# Altium PCB pcb.PcbDoc
Units mm, origin at the board's own origin, x right, y up, seen from the top; angles counter-clockwise.
Board outline 35 x 11 mm, 2 copper layers (Top Layer, Bottom Layer), stack 1.971 mm thick; 27 components, 23 nets, 113 pads, 17 vias.
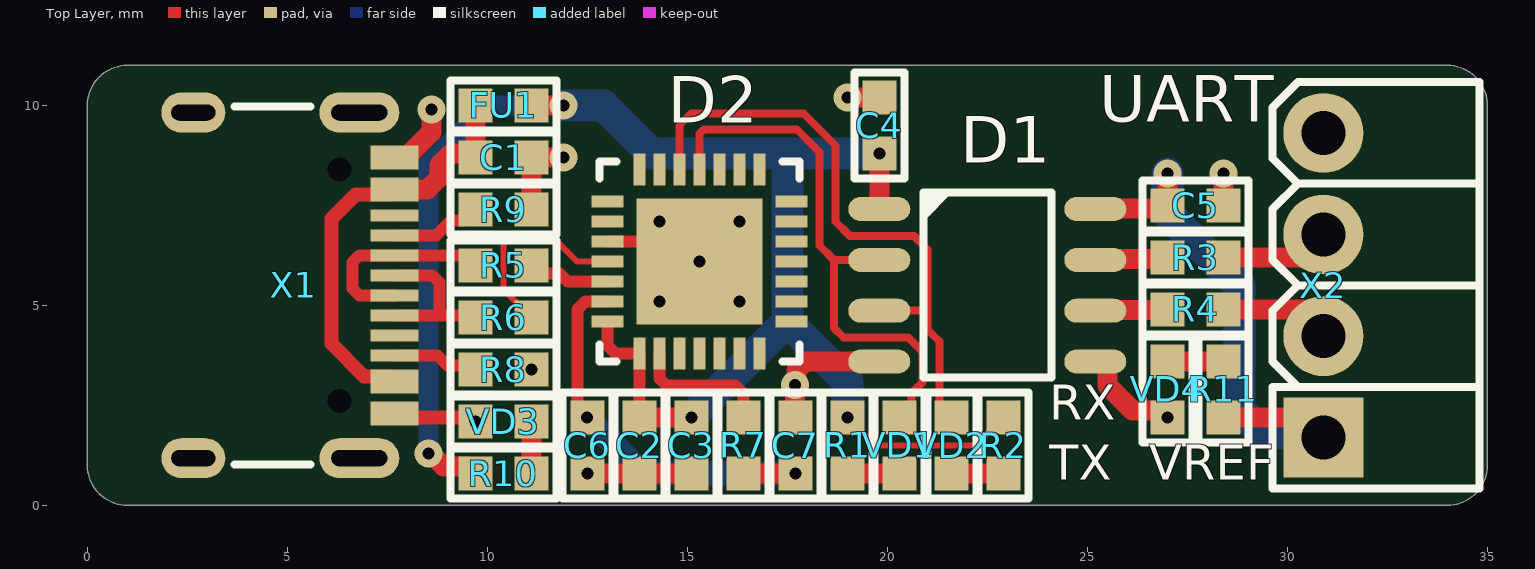
[diagram p0: Top Layer view]
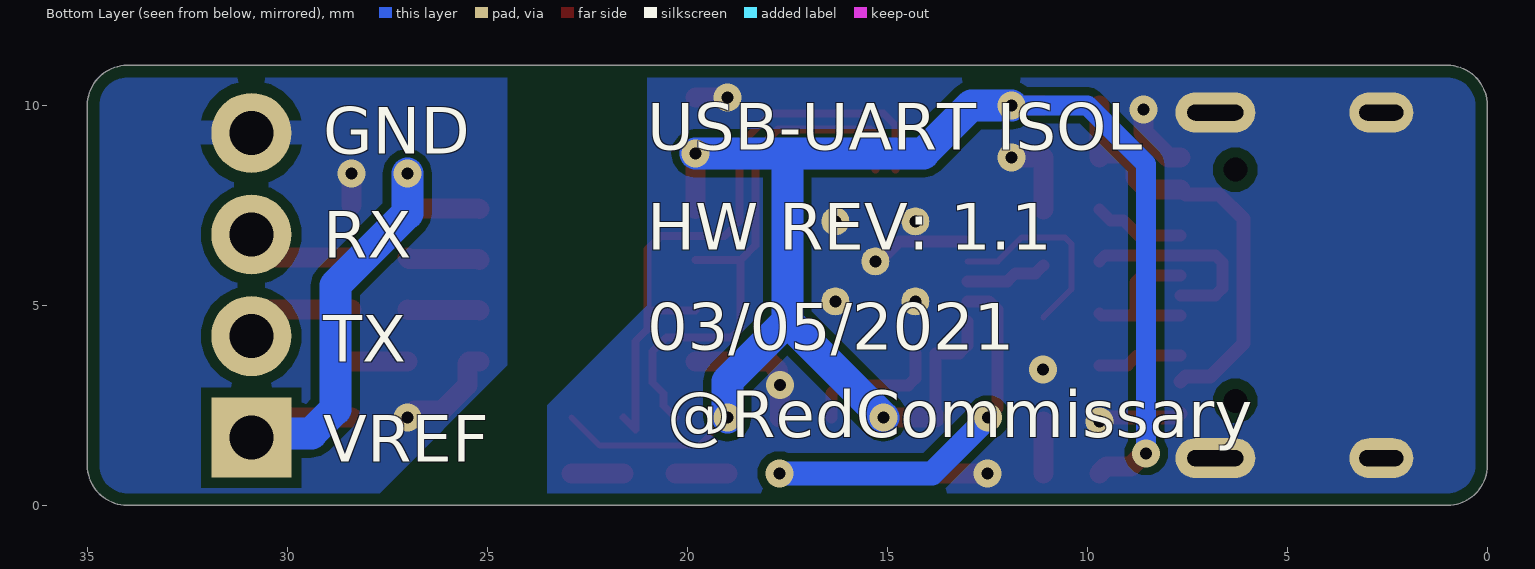
[diagram p1: Bottom Layer view, seen from below]
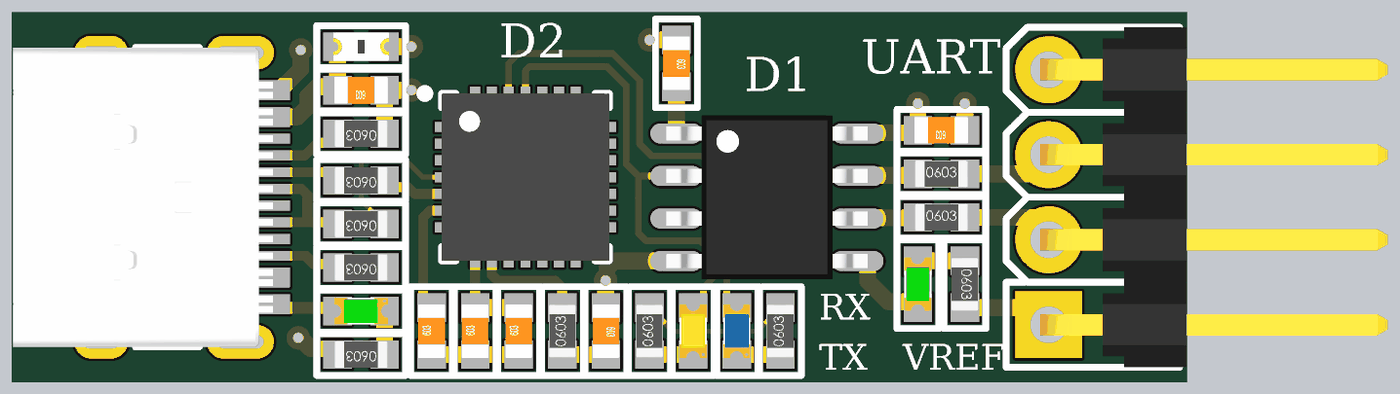
[diagram p2: 3D render of the assembled board from above, using the file's embedded part models]

## Layer stack, top to bottom
Top Solder: solder mask 0.0102, Solder Resist, Dk 3.5
Top Layer: signal copper 0.0356
Dielectric 1: dielectric 1.9, FR-4, Dk 4.8
Bottom Layer: signal copper 0.0356
Bottom Solder: solder mask 0.0102, Solder Resist, Dk 3.5

## Board outline
0,1 0,10 cw(c1,10) 1,11 34,11 cw(c34,10) 35,10 35,1 cw(c34,1) 34,0 1,0 cw(c1,1)

## Design rules (kind name [scope] priority, off if disabled: settings)
BoardOutlineClearance [All] p1: gap=0.3 ignorepadtopadclearanceinfootprint=FALSE
Clearance Clearance_NPTH [All vs InPadClass('NPTH')] p1: gap=0.4 ignorepadtopadclearanceinfootprint=FALSE except(0: Arc-Hole Track-Hole SMDPad-Hole THPad-Hole Via-Hole Fill-Hole Poly-Hole Region-Hole Text-Hole)
Clearance Clearance_MultiLayerPad [OnLayer('Multi-Layer') and IsPad] p2: gap=0.25 ignorepadtopadclearanceinfootprint=FALSE except(0: Arc-Hole Track-Hole SMDPad-Hole THPad-Hole Via-Hole Fill-Hole Poly-Hole Region-Hole Text-Hole)
Clearance Clearance_Polygon [InPolygon] p3: gap=0.2 ignorepadtopadclearanceinfootprint=FALSE except(0: Arc-Hole Track-Hole SMDPad-Hole THPad-Hole Via-Hole Fill-Hole Poly-Hole Region-Hole Text-Hole; 0.5: Poly-Poly)
Clearance [All] p4: gap=0.2 ignorepadtopadclearanceinfootprint=FALSE except(0: Arc-Hole Track-Hole SMDPad-Hole THPad-Hole Via-Hole Fill-Hole Poly-Hole Region-Hole Text-Hole)
Height [All] p1: minheight=0 maxheight=60 prefheight=12.7
HoleSize [All] p1: absolutevalues=TRUE maxlimit=5 minlimit=0.025 maxpercent=80.000 minpercent=20.000
HoleToHoleClearance [All] p1: gap=0.2 allowstackedmicrovias=TRUE
MinimumSolderMaskSliver [All] p1: minsoldermaskwidth=0.05
PlaneClearance [All] p1: clearance=0.5
PlaneConnect [All] p1: planeconnectstyle=Relief reliefexpansion=0.5 reliefentries=4 reliefconductorwidth=0.3 reliefairgap=0.2
PolygonConnect PolygonConnect_PowerPAD [All vs InPadClass('PowerPAD')] p1: connectstyle=Direct reliefconductorwidth=1 reliefentries=4 polygonreliefangle="90 Angle" airgapwidth=0.3
PolygonConnect PolygonConnect_PadGND [InNet('GND') and IsPad] p2: connectstyle=Direct reliefconductorwidth=0.5 reliefentries=4 polygonreliefangle="90 Angle" airgapwidth=0.2
PolygonConnect PolygonConnect_Via [IsVia] p3: connectstyle=Direct reliefconductorwidth=0.254 reliefentries=4 polygonreliefangle="90 Angle" airgapwidth=0.254
PolygonConnect [All] p4: connectstyle=Relief reliefconductorwidth=0.6 reliefentries=4 polygonreliefangle="90 Angle" airgapwidth=0.3
RoutingVias [All] p1: holewidth=0.3 width=0.7 viastyle="Through Hole" minholewidth=0.3 minwidth=0.6 maxholewidth=0.5 maxwidth=1.2
SilkToSilkClearance [All] p1: silktosilkclearance=0
SilkToSolderMaskClearance [IsPad] p1: minsilkscreentomaskgap=0.05 clearancetoexposedcopper=TRUE
SolderMaskExpansion [All] p1: expansion=0.075 istentingtop=FALSE
Width [All] p1: maxlimit=10 minlimit=0.15 preferedwidth=0.15
22 further rules are at their usual default settings.

## Components (designator, comment, footprint, x,y, rotation, side; value= is the part's Value field where it differs from the comment)
C1 "Ceramic capacitor, 4.7μF, X7R, ±10%, 6.3V, 0603, -55...+125°C" "CAP: 0603" 10.4,8.7 r180 top value=4.7μF
C2 "Ceramic capacitor, 4.7μF, X7R, ±10%, 6.3V, 0603, -55...+125°C" "CAP: 0603" 13.8,1.5 r90 top value=4.7μF
C3 "Ceramic capacitor, 0.1μF, X7R, ±10%, 50V, 0603, -55...+125°C" "CAP: 0603" 15.1,1.5 r90 top value=0.1μF
C4 "Ceramic capacitor, 0.1μF, X7R, ±10%, 50V, 0603, -55...+125°C" "CAP: 0603" 19.8,9.5 r270 top value=0.1μF
C5 "Ceramic capacitor, 4.7μF, X7R, ±10%, 6.3V, 0603, -55...+125°C" "CAP: 0603" 27.7,7.5 r180 top value=4.7μF
C6 "Ceramic capacitor, 4.7μF, X7R, ±10%, 6.3V, 0603, -55...+125°C" "CAP: 0603" 12.5,1.5 r90 top value=4.7μF
C7 "Ceramic capacitor, 0.1μF, X7R, ±10%, 50V, 0603, -55...+125°C" "CAP: 0603" 17.7,1.5 r270 top value=0.1μF
D1 "IC digital isolator, 100Mbps, 3000Vrms, 2.25...5.5V, -55...+125°C, 8-SOIC" 8-SOIC 22.5,5.5 r0 top locked
D2 "IC usb-to-uart bridge, USB2.0, 3...3.6V, -40...+85°C, 28-VFQFN" "28-QFN (5x5)" 15.3,6.1 r0 top
FU1 "Electromechanics relay, 63VDC, 0.5A, case 0603," "FUSE: 0603" 10.4,10 r0 top
R1 "Resistor film, 1k, ±5%, 0603, 0.1W, -55...+125°C" "RES: 0603" 19,1.5 r90 top value=1k
R2 "Resistor film, 1k, ±5%, 0603, 0.1W, -55...+125°C" "RES: 0603" 22.9,1.5 r90 top value=1k
R3 "Resistor film, 100R, ±5%, 0603, 0.1W, -55...+125°C" "RES: 0603" 27.7,6.2 r0 top value=100R
R4 "Resistor film, 100R, ±5%, 0603, 0.1W, -55...+125°C" "RES: 0603" 27.7,4.9 r0 top value=100R
R5 "Resistor film, 22R, ±1%, 0603, 0.1W, -55...+125°C" "RES: 0603" 10.4,6 r180 top value=22R
R6 "Resistor film, 22R, ±1%, 0603, 0.1W, -55...+125°C" "RES: 0603" 10.4,4.7 r180 top value=22R
R7 "Resistor film, 1k, ±1%, 0603, 0.1W, -55...+125°C" "RES: 0603" 16.4,1.5 r90 top value=1k
R8 "Resistor film, 5k1, ±1%, 0603, 0.1W, -55...+125°C" "RES: 0603" 10.4,3.4 r180 top value=5k1
R9 "Resistor film, 5k1, ±1%, 0603, 0.1W, -55...+125°C" "RES: 0603" 10.4,7.4 r180 top value=5k1
R10 "Resistor film, 1k, ±5%, 0603, 0.1W, -55...+125°C" "RES: 0603" 10.4,0.8 r180 top value=1k
R11 "Resistor film, 1k, ±5%, 0603, 0.1W, -55...+125°C" "RES: 0603" 28.4,2.9 r270 top value=1k
VD1 "LED, 20mA, 2V, 0603, -55...+150°C" "LED: 0603Y" 20.3,1.5 r90 top
VD2 "LED, 20mA, 3.2V, 0603, -55...+150°C" "LED: 0603B" 21.6,1.5 r90 top
VD3 "LED, 20mA, 2V, 0603, -55...+150°C" "LED: 0603G" 10.4,2.1 r180 top
VD4 "LED, 20mA, 2V, 0603, -55...+150°C" "LED: 0603G" 27,2.9 r270 top
X1 "USB Type C, 3A" "CON: TYPE-C-31-M-12" 6.3,5.5 r90 top locked
X2 "Connector, 4pin, 2.54mm, 500VAC, 3A" "CON: PLS-4R" 30.9,5.5 r90 top

## Footprints (in the part's own frame and the unit in brackets; to place one, negate y for a bottom-side part, rotate by r counter-clockwise, add the part's x,y. Pads: shape width x height; smd on the part's side, far side on the other; paste and mask are expansions set on the pad)
8-SOIC [mm] "pitch 1.27 mm"
  rrect100% 1.55x0.6 smd: 1(-2.7,1.905) 2(-2.7,0.635) 3(-2.7,-0.635) 4(-2.7,-1.905) 5(2.7,-1.905) 6(2.7,-0.635) 7(2.7,0.635) 8(2.7,1.905)
  round 0.7 on Mech1: 28(-2.395,1.8)
  silkscreen extent -1.59,-2.3 1.61,2.33, body extent -3,-2.45 3,2.45, height 1.75
"28-QFN (5x5)" [mm] "5x5 mm, pitch 0.5 mm, power pad"
  round 0.7 hole 0.3 mask+0.075: 0(-1,-1) 0(-1,1) 0(0,0) 0(1,-1) 0(1,1)
  rect 3.15x3.15 smd: 0(0,0)
  rect 0.8x0.3 smd: 1(-2.3,1.5) 2(-2.3,1) 3(-2.3,0.5) 4(-2.3,0) 5(-2.3,-0.5) 6(-2.3,-1) 7(-2.3,-1.5) 15(2.3,-1.5) 16(2.3,-1) 17(2.3,-0.5) 18(2.3,0) 19(2.3,0.5) 20(2.3,1) 21(2.3,1.5)
  rect 0.3x0.8 smd: 8(-1.5,-2.3) 9(-1,-2.3) 10(-0.5,-2.3) 11(0,-2.3) 12(0.5,-2.3) 13(1,-2.3) 14(1.5,-2.3) 22(1.5,2.3) 23(1,2.3) 24(0.5,2.3) 25(0,2.3) 26(-0.5,2.3) 27(-1,2.3) 28(-1.5,2.3)
  round 0.5 on Top Overlay: ""(-3,2.5)
  round 0.5 on Mech1: ""(-2,2)
  silkscreen extent -2.5,-2.5 2.5,2.5, body extent -2.5,-2.5 2.5,2.5, height 0.9
"CAP: 0603" [mm]
  rect 0.85x0.85 smd: 1(-0.7,0) 2(0.7,0)
  silkscreen extent -1.33,-0.63 1.33,0.63, body extent -0.8,-0.4 0.8,0.4, height 0.3
"CON: PLS-4R" [mm] "PLS-4R 4 pin header"
  rect 2x2 hole 1.1: 1(-3.81,0)
  round 2 hole 1.1: 2(-1.27,0) 3(1.27,0) 4(3.81,0)
  silkscreen extent -5.08,-3.9 5.08,1.27, body extent -5.08,-10.11 5.08,0.25, height 2.56
"CON: TYPE-C-31-M-12" [mm]
  rect 0.6x1.2 smd mask+0.075: A1(3.2,-1.375) A4(2.4,-1.375) B1(-3.2,-1.375) B4(-2.4,-1.375)
  rect 0.3x1.2 smd mask+0.075: A5(1.25,-1.375) A6(0.25,-1.375) A7(-0.25,-1.375) A8(-1.25,-1.375) B5(-1.75,-1.375) B6(-0.75,-1.375) B7(0.75,-1.375) B8(1.75,-1.375)
  oval 1x2 hole 0.4 slot 1.4 at 90 deg mask+0.075: MH(-4.32,-0.5) MH(4.32,-0.5)
  oval 1x1.6 hole 0.4 slot 1.1 at 90 deg mask+0.075: MH(-4.32,3.65) MH(4.32,3.65)
  round 0 hole 0.6 mask+0.075: MH(-2.89,0) MH(2.89,0)
  silkscreen extent -4.47,0.72 4.47,2.63, body extent -4.48,-1.48 4.48,6.28, height 3.26
"FUSE: 0603" [mm]
  rect 0.85x0.85 smd: 1(-0.7,0) 2(0.7,0)
  silkscreen extent -1.33,-0.63 1.33,0.63, body extent -0.82,-0.42 0.83,0.43, height 0.53
"LED: 0603B" [mm]
  rect 0.85x0.85 smd: 1(-0.7,0) 2(0.7,0)
  silkscreen extent -1.33,-0.63 1.33,0.6, body extent -0.8,-0.4 0.8,0.4, height 0.6
"LED: 0603G" [mm]
  rect 0.85x0.85 smd: 1(-0.7,0) 2(0.7,0)
  silkscreen extent -1.33,-0.63 1.33,0.63, body extent -0.8,-0.4 0.8,0.4, height 0.6
"LED: 0603Y" [mm]
  rect 0.85x0.85 smd: 1(-0.7,0) 2(0.7,0)
  silkscreen extent -1.33,-0.63 1.33,0.63, body extent -0.8,-0.4 0.8,0.4, height 0.6
"RES: 0603" [mm]
  rect 0.85x0.85 smd: 1(-0.7,0) 2(0.7,0)
  silkscreen extent -1.33,-0.63 1.33,0.63, body extent -0.8,-0.4 0.8,0.4, height 0.44

## Part data
C1 C2 C5 C6: library part Ceramic_0603, Manufacturer=Samsung, Package=0603, PartNumber=CL10B475KQ8NQNC, Temperature=-55...+125°C, Tolerance=±10%, TypeCapacitor="Ceramic capacitor", TypeDielectric=X7R, Voltage=6.3V, HelpURL=https://www.digikey.com/product-detail/en/samsung-electro-mechanics/CL10B475KQ8NQNC/1276-2087-6-ND/3892601, ValueManufacturerPartNumber="Ceramic capacitor, 4.7μF, X7R, ±10%, 6.3V, 0603, -55...+125°C"
C3 C4 C7: library part Ceramic_0603, Manufacturer=Samsung, Package=0603, PartNumber=CL10B104KB8NNNL, Temperature=-55...+125°C, Tolerance=±10%, TypeCapacitor="Ceramic capacitor", TypeDielectric=X7R, Voltage=50V, HelpURL=https://www.digikey.com/product-detail/en/samsung-electro-mechanics/CL10B104KB8NNNL/1276-CL10B104KB8NNNLCT-ND/10320686, ValueManufacturerPartNumber="Ceramic capacitor, 0.1μF, X7R, ±10%, 50V, 0603, -55...+125°C"
D1: library part ISO7721DR, "Digital isolator 1/1", Manufacturer="Texas Instruments", Package=8-SOIC, Temperature=-55...+125°C, ComponentType="IC digital isolator", DataRate=100Mbps, HelpURL=https://www.digikey.com/product-detail/en/texas-instruments/ISO7721DR/296-48296-1-ND/8347715, Isolation=3000Vrms, PartNumber=ISO7721DR, Supply=2.25...5.5V, ValueManufacturerPartNumber="IC digital isolator, 100Mbps, 3000Vrms, 2.25...5.5V, -55...+125°C, 8-SOIC"
D2: library part CP2102N, "USB-to-UART", Manufacturer="Silicon Labs", Package=28-VFQFN, PartNumber=CP2102N-A02-GQFN28, Temperature=-40...+85°C, ComponentType="IC usb-to-uart bridge", HelpURL=https://www.digikey.com/product-detail/en/silicon-labs/CP2102N-A02-GQFN28/336-5889-ND/9863477, Standard=USB2.0, Supply=3...3.6V, ValueManufacturerPartNumber="IC usb-to-uart bridge, USB2.0, 3...3.6V, -40...+85°C, 28-VFQFN"
FU1: library part Fuse, Manufacturer=Eaton, MaxCurrent=0.5A, Package="case 0603", PartNumber=TR-0603HV500-R, VoltageMax=63VDC, HelpURL=https://www.digikey.com/en/products/detail/eaton-electronics-division/TR-0603HV500-R/11491664, TypeFuse="Electromechanics relay", ValueManufacturerPartNumber="Electromechanics relay, 63VDC, 0.5A, case 0603,"
R1 R2 R10 R11: library part Resistor_0603, Manufacturer=Yageo, Package=0603, PartNumber=RC0603JR-071KL, Power=0.1W, Temperature=-55...+125°C, Tolerance=±5%, TypeResistor="Resistor film", HelpURL=https://www.digikey.com/product-detail/en/yageo/RC0603JR-071KL/311-1.0KGRCT-ND/729624, ValueManufacturerPartNumber="Resistor film, 1k, ±5%, 0603, 0.1W, -55...+125°C"
R3 R4: library part Resistor_0603, Manufacturer=Yageo, Package=0603, PartNumber=RC0603JR-07100RL, Power=0.1W, Temperature=-55...+125°C, Tolerance=±5%, TypeResistor="Resistor film", HelpURL=https://www.digikey.com/product-detail/en/yageo/RC0603JR-07100RL/311-100GRCT-ND/729644, ValueManufacturerPartNumber="Resistor film, 100R, ±5%, 0603, 0.1W, -55...+125°C"
R5 R6: library part Resistor_0603, Manufacturer=Yageo, Package=0603, PartNumber=RC0603FR-0722RL, Power=0.1W, Temperature=-55...+125°C, Tolerance=±1%, TypeResistor="Resistor film", HelpURL=https://www.digikey.com/product-detail/en/yageo/RC0603FR-0722RL/311-22-0HRCT-ND/730002, ValueManufacturerPartNumber="Resistor film, 22R, ±1%, 0603, 0.1W, -55...+125°C"
R7: library part Resistor_0603, Manufacturer=Yageo, Package=0603, PartNumber=RC0603FR-071KL, Power=0.1W, Temperature=-55...+125°C, Tolerance=±1%, TypeResistor="Resistor film", HelpURL=https://www.digikey.com/product-detail/en/yageo/RC0603FR-071KL/311-1-00KHRCT-ND/729790, ValueManufacturerPartNumber="Resistor film, 1k, ±1%, 0603, 0.1W, -55...+125°C"
R8 R9: library part Resistor_0603, Manufacturer=Yageo, Package=0603, PartNumber=RC0603FR-075K1L, Power=0.1W, Temperature=-55...+125°C, Tolerance=±1%, TypeResistor="Resistor film", HelpURL=https://www.digikey.com/product-detail/en/yageo/RC0603FR-075K1L/311-5-10KHRCT-ND/730215, ValueManufacturerPartNumber="Resistor film, 5k1, ±1%, 0603, 0.1W, -55...+125°C"
VD1: library part LED_single, Color=YELLOW, Current=20mA, Manufacturer=Wurth, Package=0603, PartNumber=150060YS75000, Temperature=-55...+150°C, VoltageDrop=2V, HelpURL=https://www.digikey.com/product-detail/en/wurth-electronics-inc/150060YS75000/732-4981-1-ND/4489907, TypeDiode=LED, ValueManufacturerPartNumber="LED, 20mA, 2V, 0603, -55...+150°C"
VD2: library part LED_single, Color=BLUE, Current=20mA, Manufacturer=Wurth, Package=0603, PartNumber=150060BS75000, Temperature=-55...+150°C, VoltageDrop=3.2V, HelpURL=https://www.digikey.com/product-detail/en/wurth-electronics-inc/150060BS75000/732-4966-1-ND/4489893, TypeDiode=LED, ValueManufacturerPartNumber="LED, 20mA, 3.2V, 0603, -55...+150°C"
VD3 VD4: library part LED_single, Color=GREEN, Current=20mA, Manufacturer=Wurth, Package=0603, PartNumber=150060VS75000, Temperature=-55...+150°C, VoltageDrop=2V, HelpURL=https://www.digikey.com/product-detail/en/wurth-electronics-inc/150060VS75000/732-4980-1-ND/4489904, TypeDiode=LED, ValueManufacturerPartNumber="LED, 20mA, 2V, 0603, -55...+150°C"
X1: library part Connector_USB_Type_C, CurrentMax=3A, Manufacturer="Korean Hroparts", PartNumber=TYPE-C-31-M-12, CommentText="\"USB Type C\"", HelpURL=https://lcsc.com/product-detail/USB-Type-C_Korean-Hroparts-Elec-TYPE-C-31-M-12_C165948.html, TypeConnector="USB Type C", ValueManufacturerPartNumber="USB Type C, 3A"
X2: library part PLS-4, CurrentMax=3A, Manufacturer=Connfly, VoltageMax=500VAC, CommentText="\"UART\"", HelpURL=https://www.chipdip.ru/product/pls-4, Multichannel=4pin, PartNumber=PLS-4, Pitch=2.54mm, TypeConnector=Connector, ValueManufacturerPartNumber="Connector, 4pin, 2.54mm, 500VAC, 3A"

## Via types
v1: diameter 0.7, hole 0.3, Top Layer to Bottom Layer, tented both sides, 17 vias

## Nets (pads, with @x,y where several pads share a name; then routed paths per layer and width w, separated by ;. In a path a pad name is that pad's centre, name@x,y a point inside that pad or via, vN(x,y) a via of type N, cw(c..) or ccw(c..) an arc to the next point about the centre after c; other vN are vias at no path point)
+3.3V: C6.2 C7.2 D2.6 R7.1 | length 10.7
  Top Layer w0.3: v1(12.488,2.2) 12.25,2.438 12.25,4.897 12.453,5.1 D2.6
  Top Layer w0.5: R7.1 v1(17.7,0.8)
  Bottom Layer w0.6: v1(12.488,2.2) 13.888,0.8 v1(17.7,0.8)
GND: C1.1 C2.1 C3.1 C4.1 C6.1 C7.1 D1.4 D2.0 D2.3 R8.1 R9.1 VD3.2 X1.A1 X1.B1 X1.MH@2.65,1.18 X1.MH@2.65,9.82 X1.MH@6.8,1.18 X1.MH@6.8,9.82 | length 15.2
  Top Layer w0.3: D2.3 14.692,6.6 15.192,6.1 D2.0@15.3,6.1
  Top Layer w0.35: X1.B1 7.775,2.2 9.6,2.2 v1(9.7,2.1)
  Top Layer w0.5: X1.A1 7.975,8.7 8.6,9.325 v1(8.6,9.9) ; R8.1 v1(11.106,3.4) ; R9.1 C1.1 v1(11.9,8.7) ; v1(12.5,0.8) C2.1 C3.1 ; C7.1 17.689,2.211 v1(17.689,3.011) 17.727,3.049 17.727,3.375 17.947,3.595 D1.4 ; v1(19,10.2) C4.1
GND2: C5.1 D1.5 VD4.2 X2.4 | length 3.5
  Top Layer w0.5: D1.5 25.454,3.595 25.5,3.549 25.5,3 26.125,2.375 26.825,2.375 v1(27,2.2) ; C5.1 v1(28.4,8.3)
NetC1_2: C1.2 FU1.1 X1.A4 X1.B4 | length 10.8
  Top Layer w0.35: X1.B4 7.55,3.225 6.92,3.225 6.1,4.045 6.1,7.165 6.71,7.775 7.55,7.775 X1.A4
  Top Layer w0.5: X1.A4 8.507,7.9 8.8,8.193 8.8,8.507 9.093,8.8 C1.2@9.7,8.8 ; C1.2 C1.2@9.7,8.8 ; FU1.1 C1.2@9.7,8.8
NetD1_2: D1.2 D2.25 VD1.2 | length 14.2
  Top Layer w0.2: D2.25 15.3,9.283 15.417,9.4 17.734,9.4 18.3,8.834 18.3,6.5 18.665,6.135 ; D1.2 18.665,6.135 ; VD1.2 20.6,2.5 20.6,2.8 20.876,3.076 20.876,3.842 20.519,4.2 18.9,4.2 18.665,4.435 18.665,6.135
NetD1_3: D1.3 D2.26 VD2.2 | length 16.2
  Top Layer w0.2: D2.26 14.8,9.5 15.1,9.8 17.9,9.8 18.7,9 18.7,7.1 19.065,6.735 20.665,6.735 21,6.4 21,4.865 ; D1.3 21,4.865 ; VD2.2 21.3,1.9 21.3,4.1 21,4.4 21,4.865
NetD1_6: D1.6 R4.1 | length 1.8
  Top Layer w0.5: D1.6 25.218,4.882 26.982,4.882 R4.1
NetD1_7: D1.7 R3.1 | length 1.8
  Top Layer w0.5: D1.7 25.219,6.154 26.954,6.154 R3.1
NetD2_4: D2.4 R6.1 | length 5
  Top Layer w0.15: R6.1 10.4,5.4 10.4,6.539 10.561,6.7 10.674,6.7 11.5,6.7 11.639,6.7 12.239,6.1 D2.4
NetD2_5: D2.5 R5.1 | length 2.1
  Top Layer w0.3: R5.1 11.3,5.8 11.8,5.8 12,5.6 D2.5
NetD2_9: D2.9 R7.2 | length 3.5
  Top Layer w0.3: D2.9 14.3,3.176 14.476,3 16.2,3 16.4,2.8 R7.2
NetR1_1: R1.1 VD1.1 | length 1.3
  Top Layer w0.5: R1.1 VD1.1
NetR2_1: R2.1 VD2.1 | length 1.3
  Top Layer w0.5: VD2.1 R2.1
NetR5_2: R5.2 X1.A7 X1.B7 | length 5
  Top Layer w0.3: X1.A7 6.801,5.25 6.625,5.426 6.625,6.074 6.801,6.25 9.55,6.25 R5.2@9.7,6.1
NetR6_2: R6.2 X1.A6 X1.B6 | length 4.1
  Top Layer w0.3: X1.B6 8.9,4.75 ; X1.A6 8.624,5.75 8.8,5.574 8.8,4.85 8.9,4.75 ; R6.2@9.7,4.8 9.65,4.75 8.9,4.75
NetR8_2: R8.2 X1.B5 | length 2.1
  Top Layer w0.3: X1.B5 8.75,3.75 9,3.5 R8.2@9.7,3.5
NetR9_2: R9.2 X1.A5 | length 2.3
  Top Layer w0.3: X1.A5 8.725,6.75 9.1,7.125 9.425,7.125 R9.2
NetR10_1: R10.1 VD3.1 | length 1.3
  Top Layer w0.5: R10.1 VD3.1
NetR11_1: R11.1 VD4.1 | length 1.4
  Top Layer w0.5: VD4.1 R11.1
USART-RX: R3.2 X2.3 | length 2.9
  Top Layer w0.5: R3.2 30.607,6.2 30.9,6.493 X2.3
USART-TX: R4.2 X2.2 | length 3
  Top Layer w0.5: R4.2 30.607,4.9 30.9,4.607 X2.2
VCC5V-USB: C2.2 C3.2 C4.2 D1.1 D2.7 D2.8 FU1.2 R1.2 R2.2 R10.2 | length 42.5
  Top Layer w0.15: v1(19,2.2) 19.7,1.5 22.2,1.5 R2.2
  Top Layer w0.3: D2.7 13,4 13.2,3.8 D2.8 C2.2@13.8,2.4
  Top Layer w0.5: v1(8.527,1.3) 8.581,1.3 8.906,0.975 9.525,0.975 R10.2 ; FU1.2 v1(11.9,10) ; C2.2 v1(15.1,2.2) ; D1.1 v1(19.8,8.8)
  Bottom Layer w0.5: v1(8.527,1.3) 8.527,8.527 10,10 v1(11.9,10)
  Bottom Layer w0.8: v1(11.9,10) 12.9,10 14.1,8.8 17.6,8.8 ; v1(15.1,2.2) 17.5,4.6 ; v1(19,2.2) 19,3.1 17.5,4.6 ; v1(19.8,8.8) 17.6,8.8 ; 17.5,4.6 17.5,8.7 17.6,8.8
VREF: C5.2 D1.8 R11.2 X2.1 | length 14.4
  Top Layer w0.5: D1.8 25.219,7.424 26.924,7.424 C5.2 v1(27,8.3) ; R11.2 30.39,2.2 X2.1
  Bottom Layer w0.8: v1(27,8.3) 27,7.3 28.8,5.5 28.8,2.4 29.4,1.8 30.79,1.8 X2.1
pads on no net: D1.28 D2. D2.1 D2.2 D2.10 D2.11 D2.12 D2.13 D2.14 D2.15 D2.16 D2.17 D2.18 D2.19 D2.20 D2.21 D2.22 D2.23 D2.24 D2.27 D2.28 X1.A8 X1.B8 X1.MH@6.3,2.61 X1.MH@6.3,8.39

## Polygon pours and split planes (outlines as drawn)
GND on Bottom Layer "GND" (solid, pour order 1): 0,0 23.5,0 23.5,2.5 21,5 21,11 0,11
GND2 on Bottom Layer "GND-ISOL" (solid, pour order 0): 35,0 28,0 24.5,3.5 24.5,11 35,11

## Silkscreen, mask and mechanical layers (free items; w line width, h text height)
Top Overlay:
  text "UART" at 25.3,9.2 h2
  text "RX" at 24.05,1.85 h1.5
  text "TX" at 24.05,0.35 h1.5
  text "VREF" at 26.55,0.35 h1.5
Bottom Overlay:
  text "USB-UART ISOL" at 21,8.5 h2
  text "GND" at 29.1,8.4 h2
  text "HW REV: 1.1" at 21,6 h2
  text "RX" at 29.1,5.8 h2
  text "03/05/2021" at 21,3.5 h2
  text "TX" at 29.1,3.2 h2
  text "@RedCommissary" at 20.5,1.317 h2
  text "VREF" at 29.1,0.7 h2
Border:
  the board outline again, w0.2

## Dimensions
0,0 to 0,11 on Size
0,11 to 35,11 on Size